# EAGLE board schema_v2_0_SMD (EAGLE 6.2)

Size 70 x 45 mm. Coordinates in mm from the lower left corner, seen from the top.
Outline: 0,0 70,0 70,45 0,45 0,0
Copper layers (1*16): Top 0.035mm / dielectric 1.5mm / Bottom 0.035mm
Design rules: minimum track width 10mil, minimum drill 24mil, track to track 8mil, track to pad 8mil, pad to pad 8mil, via to via 8mil, smd to smd 8mil, copper to edge 40mil, drill to drill 8mil, minimum pad ring 10mil, minimum via ring 8mil, stop-mask expansion 4mil, vias tented up to drill 0mil, thermal gap 10mil
Net classes: 0 default: width 0.203 mm
Holes 8 mm at 35,22.5

## Footprints (pad centres in the part's own frame; a part is rotated, then mirrored left to right if it is on the bottom)
TACTILE_SWITCH_SMD = smd 1.524 x 0.762: 1 -2.54,1.905; 2 2.54,1.905; 3 -2.54,-1.905; 4 2.54,-1.905
C0805 = smd 1.3 x 1.5: 1 -0.95,0; 2 0.95,0
UD-6,3X5,8_NICHICON = smd 2.8 x 1: + 2.35,0; - -2.35,0
DO214AC = smd 1.8 x 1.7: A 2.05,0; C -2.05,0
DIL28-3 = drill 0.813 long: 1 -16.51,-3.81; 2 -13.97,-3.81; 3 -11.43,-3.81; 4 -8.89,-3.81; 5 -6.35,-3.81; 6 -3.81,-3.81; 7 -1.27,-3.81; 8 1.27,-3.81; 9 3.81,-3.81; 10 6.35,-3.81; 11 8.89,-3.81; 12 11.43,-3.81; 13 13.97,-3.81; 14 16.51,-3.81; 15 16.51,3.81; 16 13.97,3.81; 17 11.43,3.81; 18 8.89,3.81; 19 6.35,3.81; 20 3.81,3.81; 21 1.27,3.81; 22 -1.27,3.81; 23 -3.81,3.81; 24 -6.35,3.81; 25 -8.89,3.81; 26 -11.43,3.81; 27 -13.97,3.81; 28 -16.51,3.81
1206 = smd 1.6 x 1.803: A -1.422,0; C 1.422,0
DIL4-SMD = smd 1.6 x 2: 1 -1.27,-4.77; 2 1.27,-4.77; 3 1.27,4.77; 4 -1.27,4.77
SOT23-BEC = smd 1 x 1.4: B -0.95,-1.1; C 0,1.1; E 0.95,-1.1
R0805 = smd 1.3 x 1.5: 1 -0.95,0; 2 0.95,0
TP13R = smd 1.3 x 1.3: TP 0,0
SSOP28DB = smd 0.348 x 1.397: 1 -4.225,-3.656; 2 -3.575,-3.656; 3 -2.925,-3.656; 4 -2.275,-3.656; 5 -1.625,-3.656; 6 -0.975,-3.656; 7 -0.325,-3.656; 8 0.325,-3.656; 9 0.975,-3.656; 10 1.625,-3.656; 11 2.275,-3.656; 12 2.925,-3.656; 13 3.575,-3.656; 14 4.225,-3.656; 15 4.225,3.656; 16 3.575,3.656; 17 2.925,3.656; 18 2.275,3.656; 19 1.625,3.656; 20 0.975,3.656; 21 0.325,3.656; 22 -0.325,3.656; 23 -0.975,3.656; 24 -1.625,3.656; 25 -2.275,3.656; 26 -2.925,3.656; 27 -3.575,3.656; 28 -4.225,3.656
PN61729-S = drill 0.95 octagon: 1 1.25,4.71; 2 -1.25,4.71; 3 -1.25,2.71; 4 1.25,2.71 | drill 2.3 pad 2.9: S1 -6.02,0; S2 6.02,0
W237-132 = drill 1.194 long: 1 -2.54,-0.635; 2 2.54,-0.635
CSM-7X-DU = smd 5.5 x 2: 1 -4.75,0; 2 4.75,0

## Placement (x,y rotation side)
BUTTON  [TACTILE_SWITCH_SMD]  62.7,6 0 bottom
C13  22pF  [C0805]  34.5,12.2 180 bottom
C14  22pF  [C0805]  34.5,15.2 180 bottom
C15  100nF  [C0805]  41.3,27.6 0 bottom
C16  100nF  [C0805]  12,3 0 bottom
C17  [UD-6,3X5,8_NICHICON]  53.4,33.6 270 bottom
C19  100nF  [C0805]  64.3,17.2 180 bottom
C23  100nF  [C0805]  12.1,16.6 270 bottom
D4  GS1B  [DO214AC]  54.6,4.1 90 bottom
D5  GS1B  [DO214AC]  51.4,25.6 90 bottom
IC1  MEGA8-P  [DIL28-3]  25.8,37.4 0 top
LED5  [1206]  20.1,24.3 270 bottom
LED7  [1206]  17.1,23.9 270 bottom
LED8  [1206]  6,3 0 bottom
LED9  [1206]  27.5,27.5 90 bottom
LED10  [1206]  24,27.5 90 bottom
OK2  SFH6206  [DIL4-SMD]  51.1,18.3 90 bottom
Q2  BC817-16SMD  [SOT23-BEC]  49.5,40.7 180 bottom
R12  22k  [R0805]  51.5,4.1 90 bottom
R13  330  [R0805]  11.4,27.8 90 bottom
R14  330  [R0805]  8.1,27.8 90 bottom
R15  330  [R0805]  6.5,6 0 bottom
R16  1k  [R0805]  29,4 0 bottom
R17  1k  [R0805]  29,6.5 0 bottom
R18  330  [R0805]  27.5,22 270 bottom
R19  330  [R0805]  24,22 270 bottom
R20  330  [R0805]  57.3,8 90 bottom
R21  1k  [R0805]  42.9,24.3 270 bottom
R22  10k  [R0805]  47.4,24.6 90 bottom
RESET  [TACTILE_SWITCH_SMD]  62.7,12 180 bottom
TP1  TPTP13R  [TP13R]  33.5,6.5 0 bottom
TP2  TPTP13R  [TP13R]  33.5,4 0 bottom
U2  [SSOP28DB]  20,9.8 270 bottom
X4  PN61729-S  [PN61729-S]  2.7,16.7 270 top
X5  [W237-132]  62.5,38.2 270 top
X6  [W237-132]  62.5,26.2 270 top
XTAL  16MHZ  [CSM-7X-DU]  41.7,10.1 90 bottom

## Library data of the parts
BUTTON RESET = SparkFun
C13-C17 C19 C23 R12-R22 = rcl
D4 D5 = diode
IC1 = atmel; OC_FARNELL: unknown; OC_NEWARK: unknown
LED5 LED7-LED10 = led
OK2 = optocoupler; MF: VISHAY/TELEFUNKEN; MPN: SFH6206-3; OC_FARNELL: 1469585; OC_NEWARK: 58K2214
Q2 = transistor-npn
TP1 TP2 = testpad
U2 = ftdichip-5
X4 = con-berg; OC_FARNELL: unknown; OC_NEWARK: unknown
X5 X6 = con-wago-508; OC_FARNELL: unknown; OC_NEWARK: unknown
XTAL = crystal; OC_FARNELL: unknown; OC_NEWARK: unknown

## Nets
5V: C15.1 C23.2 D4.C IC1.7 IC1.20 R12.1 R13.2 R14.2 R15.2 U2.4 U2.19 U2.20 X4.1
AGND: U2.25
GND: BUTTON.1 BUTTON.2 C13.1 C14.1 C15.2 C16.2 C19.2 C23.1 IC1.8 IC1.22 LED8.C LED9.C LED10.C OK2.2 RESET.3 RESET.4 U2.26 X4.4 X4.S1 X4.S2
GND1: U2.7
GND2: U2.18
GND3: U2.21
N$1: IC1.2 R16.1 TP2.TP
N$2: IC1.3 R17.1 TP1.TP
N$3: C19.1 IC1.21
N$35: C14.2 IC1.10 XTAL.2
N$36: C13.2 IC1.9 XTAL.1
N$38: D4.A IC1.1 R12.2 RESET.1 RESET.2
N$39: LED5.A R13.1
N$40: LED7.A R14.1
N$41: LED5.C U2.23
N$42: LED7.C U2.22
N$43: R16.2 U2.5
N$44: R17.2 U2.1
N$45: BUTTON.3 BUTTON.4 R20.1
N$46: IC1.6 R18.2
N$48: U2.16 X4.2
N$49: U2.15 X4.3
N$50: IC1.5 R19.2
N$51: LED8.A R15.1
N$52: IC1.23 R20.2
N$96: C16.1 U2.17
N$97: LED9.A R18.1
N$98: LED10.A R19.1
N$101: OK2.3 Q2.B
N$102: OK2.1 R21.1
N$103: IC1.11 R21.2
N$104: OK2.4 R22.2
N$105: C17.+ D5.C R22.1 X5.2 X6.2
N$106: C17.- D5.A Q2.C X6.1
N$107: Q2.E X5.1

## Tracks (layer width: path | path; a pad name or v marks a point on that pad's centre or on a via)
5V  (12 unrouted)
GND  (19 unrouted)
N$1  (2 unrouted)
N$2  (2 unrouted)
N$3  (1 unrouted)
N$35  (2 unrouted)
N$36  (2 unrouted)
N$38  (4 unrouted)
N$39  (1 unrouted)
N$40  (1 unrouted)
N$41  (1 unrouted)
N$42  (1 unrouted)
N$43  (1 unrouted)
N$44  (1 unrouted)
N$45  (2 unrouted)
N$46  (1 unrouted)
N$48  (1 unrouted)
N$49  (1 unrouted)
N$50  (1 unrouted)
N$51  (1 unrouted)
N$52  (1 unrouted)
N$96  (1 unrouted)
N$97  (1 unrouted)
N$98  (1 unrouted)
N$101  (1 unrouted)
N$102  (1 unrouted)
N$103  (1 unrouted)
N$104  (1 unrouted)
N$105  (4 unrouted)
N$106  (3 unrouted)
N$107  (1 unrouted)
(copper drawn outside any net)
  shapes: Bottom circle x2